# Altium PCB 7-SEGMENT.PcbDoc
Units mil, origin at the board's own origin, x right, y up, seen from the top; angles counter-clockwise.
Board outline 6000 x 4000 mil, 2 copper layers (Top Layer, Bottom Layer); 19 components, 31 nets, 85 pads, 10 vias.
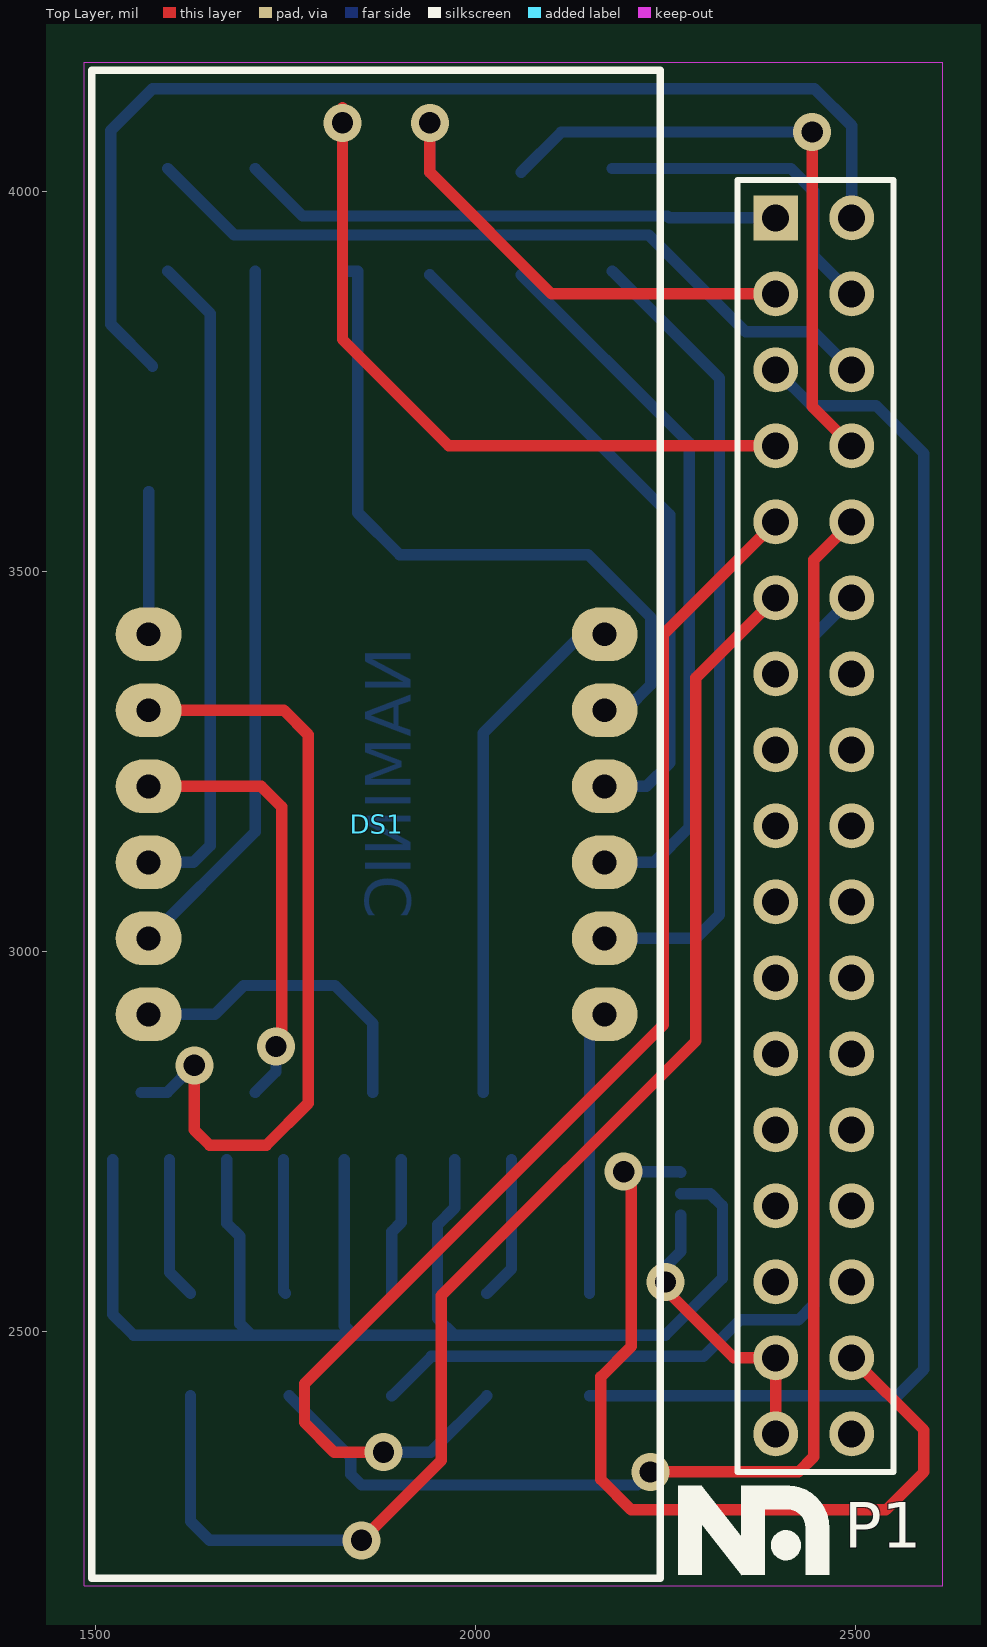
[diagram p0: Top Layer view]
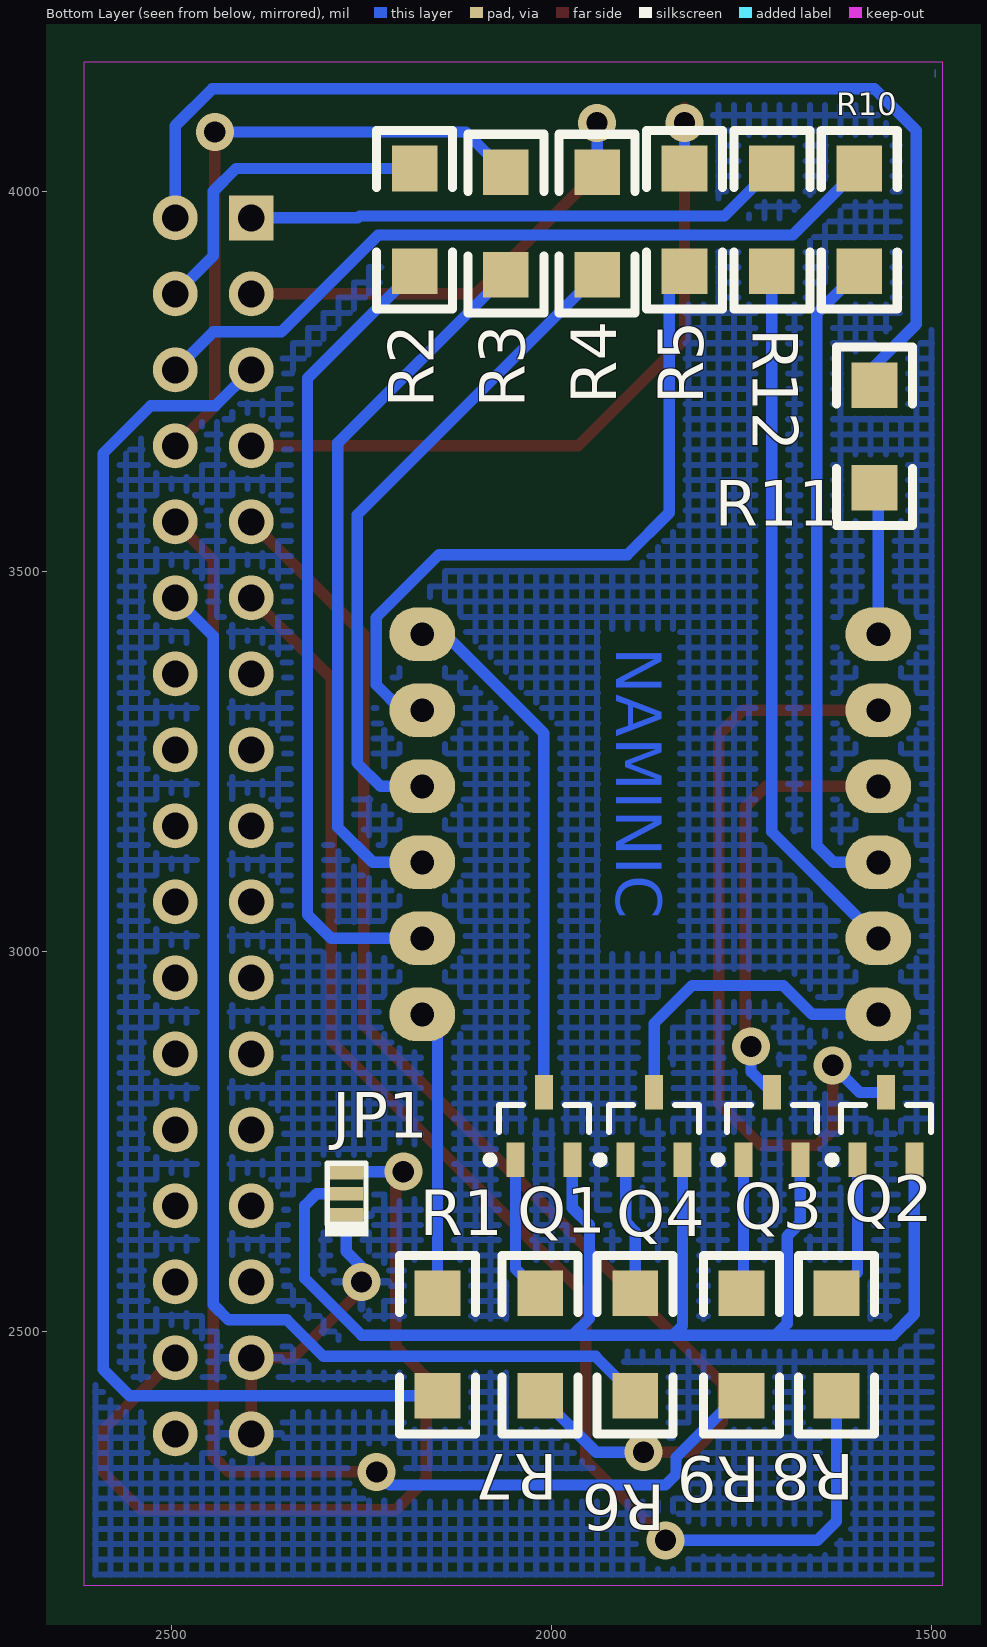
[diagram p1: Bottom Layer view, seen from below]
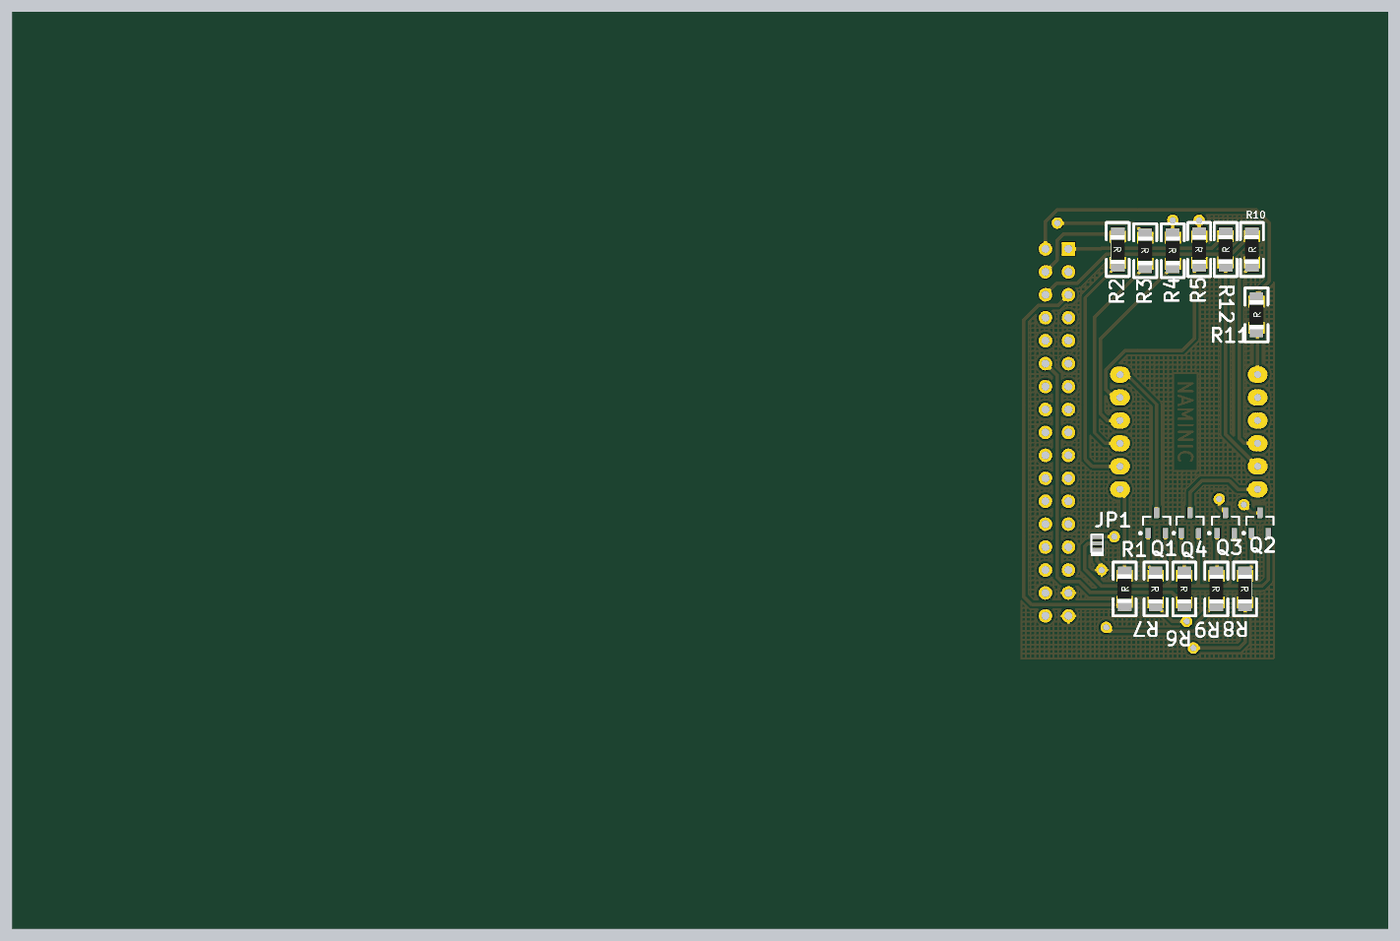
[diagram p2: 3D render of the assembled board from below, using the file's embedded part models]

## Layer stack, top to bottom
Top Layer: signal copper 1.4
Dielectric: dielectric 12.6, FR-4, Dk 4.8
Bottom Layer: signal copper 1.4

## Board outline
1000,1000 7000,1000 7000,5000 1000,5000

## Design rules (kind name [scope] priority, off if disabled: settings)
Clearance [All] p1: gap=10
PolygonConnect [All] p1: connectstyle=Relief reliefconductorwidth=10 reliefentries=4 polygonreliefangle="90 Angle"
RoutingVias [All] p1: holewidth=28 width=50 viastyle="Through Hole" minholewidth=28 minwidth=50 maxholewidth=28 maxwidth=50
SilkscreenOverComponentPads SilkToSolderMaskClearance [IsPad] p1: minsilkscreentomaskgap=10
SolderMaskExpansion [All] p1: expansion=4
Width [All] p1: maxlimit=20 minlimit=15 preferedwidth=15
27 further rules are at their usual default settings.

## Components (designator, comment, footprint, x,y, rotation, side; value= is the part's Value field where it differs from the comment)
DS1 "7Segment" 7SEGMENT 1495,2175 r90 top
JP1 "Jumper" JT3 2270,2680 r90 bottom
P1 "Header 17X2" HDR1X17 2395,3965 r270 top
Q1 "BC857C" SOT-23A_N 2010,2770 r90 bottom (schematic designator q1)
Q2 "BC857C" SOT-23A_N 1560,2770 r90 bottom (schematic designator q2)
Q3 "BC857C" SOT-23A_N 1710,2770 r90 bottom (schematic designator q3)
Q4 "BC857C" SOT-23A_N 1865,2770 r90 bottom (schematic designator q4)
R1 "180" 1206#1 2150,2415 r90 bottom
R2 "180" 1206#1 2180,4030 r270 bottom
R3 "180" 1206#1 2060,4025 r270 bottom
R4 "180" 1206#1 1940,4025 r270 bottom
R5 "180" 1206#1 1825,4030 r270 bottom
R6 "10K" 1206#1 1890,2550 r270 bottom
R7 "10K" 1206#1 2015,2550 r270 bottom
R8 "10K" 1206#1 1625,2550 r270 bottom
R9 "10K" 1206#2 1750,2550 r90 bottom
R10 "180" 1206#1 1595,3895 r90 bottom
R11 "180" 1206#1 1575,3610 r90 bottom
R12 "180" 1206#1 1710,3895 r90 bottom

## Footprints (in the part's own frame and the unit in brackets; to place one, negate y for a bottom-side part, rotate by r counter-clockwise, add the part's x,y. Pads: shape width x height; smd on the part's side, far side on the other; paste and mask are expansions set on the pad)
7SEGMENT [mm]
  oval 1.8x2.2 hole 0.8: 1(18.85,-1.905) 2(21.39,-1.905) 3(23.93,-1.905) 4(26.47,-1.905) 5(29.01,-1.905) 6(31.55,-1.905) 7(31.55,-17.145) 8(29.01,-17.145) 9(26.47,-17.145) 10(23.93,-17.145) 11(21.39,-17.145) 12(18.85,-17.145)
  silkscreen extent 0,-19 50.4,0
1206#1 [mil]
  rect 60x60 smd: 1(0,0) 2(135,0)
  silkscreen extent -50,-50 185,50, body extent -14,-35 151,36, height 25
1206#2 [mil]
  rect 60x60 smd: 1(0,0) 2(-135,0)
  silkscreen extent -185,-50 50,50, body extent -151,-36 14,35, height 25
HDR1X17 [mm] "Connector; Header; 17 Position"
  rect 1.5x1.5 hole 0.9: 1(0,0)
  round 1.5 hole 0.9: 2(0,2.54) 3(2.54,0) 4(2.54,2.54) 5(5.08,0) 6(5.08,2.54) 7(7.62,0) 8(7.62,2.54) 9(10.16,0) 10(10.16,2.54) 11(12.7,0) 12(12.7,2.54) 13(15.24,0) 14(15.24,2.54) 15(17.78,0) 16(17.78,2.54) 17(20.32,0) 18(20.32,2.54) 19(22.86,0) 20(22.86,2.54) 21(25.4,0) 22(25.4,2.54) 23(27.94,0) 24(27.94,2.54) 25(30.48,0) 26(30.48,2.54) 27(33.02,0) 28(33.02,2.54) 29(35.56,0) 30(35.56,2.54) 31(38.1,0) 32(38.1,2.54) 33(40.64,0) 34(40.64,2.54)
  silkscreen extent -1.27,-1.27 41.91,3.94
JT3 [mil]
  rect 18x45 smd mask+4: 1(-27,0) 2(1,0) 3(29,0)
  silkscreen extent -55,-30 41,28
SOT-23A_N [mm] "SOT23, 3-Leads, Body 2.9x1.3mm, Pitch 0.95mm, Lead Span 2.3mm, IPC Medium Density"
  rect 1.15x0.6 smd: 1(-1.125,0.95) 2(-1.125,-0.95) 3(1.125,0)
  silkscreen extent -1.25,-1.5 0.7,1.93, body extent -0.7,-1.5 0.7,1.5, height 1.09

## Part data
JP1: library part "Jumper Selector", "Jumper Selector"
P1: "Header, 17-Pin, Dual row"
Q1 Q2 Q3 Q4: "PNP General Purpose Amplifier"
R1 R2 R3 R4 R5 R6 R7 R8 R9 R10 R11 R12: library part Res1, "Resistor"

## Via types
v1: diameter 50, hole 28, Top Layer to Bottom Layer, 10 vias

## Nets (pads, with @x,y where several pads share a name; then routed paths per layer and width w, separated by ;. In a path a pad name is that pad's centre, name@x,y a point inside that pad or via, vN(x,y) a via of type N, cw(c..) or ccw(c..) an arc to the next point about the centre after c; other vN are vias at no path point)
3.3V: JP1.3 P1.32 | length 1138.6
  Top Layer w15: v1@2195,2700 v1(2195,2710) ; v1@2205,2690 2205,2480 2165,2440 2165,2305 2205,2265 2540,2265 2590,2315 2590,2370 P1.32
  Bottom Layer w15: v1(2195,2710) 2269,2710 JP1.3
A: P1.1 R12.2 | length 711.9
  Bottom Layer w15: R12.2 1772.5,3967.5 2252.5,3967.5 2255,3965 P1.1
B: P1.2 R11.2 | length 1471.9
  Bottom Layer w15: R11.2@1575,3770 1520,3825 1520,4080 1575,4135 2446.1,4135 2495,4086.1 P1.2
C: P1.3 R4.1 | length 651.3
  Top Layer w15: v1(1940,4090) 1940,4025 2100,3865 P1.3
  Bottom Layer w15: R4.1 v1(1940,4090)
D: P1.4 R2.1 | length 433.1
  Bottom Layer w15: R2.1 2415,4030 2445,4000 2445,3915 P1.4
DK1: P1.9 R7.2 | length 1728.6
  Top Layer w15: v1(1879,2341) 1814,2341 1775,2380 1775,2431 2247,2903 2247,3417 P1.9
  Bottom Layer w15: v1(1879,2341) 1941,2341 R7.2
DK2: P1.11 R8.2 | length 1866.1
  Top Layer w15: v1(1850,2225) 1955,2330 1955,2547 2290,2882 2290,3360 P1.11
  Bottom Layer w15: R8.2 1625,2250 1650,2225 v1(1850,2225)
DK3: P1.10 R9.2 | length 2017.6
  Top Layer w15: v1(2230,2315) 2425,2315 2445,2335 2445,3515 P1.10
  Bottom Layer w15: R9.2@1755,2415 1836.12,2333.88 1836.12,2311.69 1850,2297.82 2212.82,2297.82 v1(2230,2315)
DK4: P1.12 R6.2 | length 1555.4
  Bottom Layer w15: R6.2 1942,2467 2300,2467 2348,2515 2425,2515 2445,2535 2445,3415 P1.12
E: P1.5 R1.1 | length 1900.1
  Bottom Layer w15: R1.1 2555,2415 2590,2450 2590,3655 2527.03,3717.97 2442.03,3717.97 P1.5
F: P1.6 R10.2 | length 1009.8
  Bottom Layer w15: R10.2 1682.5,3942.5 2228,3942.5 2355.5,3815 2445,3815 P1.6
G: P1.7 R5.1 | length 993
  Top Layer w15: v1@1825,4110 v1(1825,4090) 1825,3805 1965,3665 P1.7
  Bottom Layer w15: R5.1 v1(1825,4090)
GND: JP1.1 P1.31 P1.33 | length 396.8
  Top Layer w15: v1(2250,2565) 2250,2555 2340,2465 P1.31 P1.33
  Bottom Layer w15: v1(2250,2565) 2240,2575 2270,2605 JP1.1
H: P1.8 R3.1 | length 839.5
  Top Layer w15: v1(2443,4078) 2443,3717 P1.8
  Bottom Layer w15: R3.1 2113,4078 v1(2443,4078)
K1: DS1.7 Q1.3 | length 686.6
  Bottom Layer w15: Q1.3 2010,3287 2140.13,3417.13 DS1.7
K2: DS1.5 Q2.3 | length 1059.2
  Top Layer w15: DS1.5 1747.87,3317.13 1780,3285 1780,2800 1725,2745 1650,2745 1630,2765 v1(1630,2850)
  Bottom Layer w15: Q2.3 1594.29,2814.29 v1(1630,2850)
K3: DS1.4 Q3.3 | length 558.6
  Top Layer w15: DS1.4@1587.87,3217.13 1717.87,3217.13 1745,3190 1745,2882.13 v1(1737.5,2874.63)
  Bottom Layer w15: Q3.3 1737.5,2841.79 v1(1737.5,2874.63)
K4: DS1.1 Q4.3 | length 447.4
  Bottom Layer w15: DS1.1@1587.87,2935 DS1.1 1657.13,2917.13 1695,2955 1815,2955 1865,2905 Q4.3
NetDS1_2: DS1.2 R12.1 | length 935.9
  Bottom Layer w15: DS1.2 1710,3157.13 R12.1
NetDS1_3: DS1.3 R10.1 | length 869.2
  Bottom Layer w15: DS1.3 1629,3117.13 1651,3139.13 1651,3839 R10.1
NetDS1_6: DS1.6 R11.1 | length 187.9
  Bottom Layer w15: DS1.6 R11.1@1570,3605
NetDS1_8: DS1.8 R5.2 | length 944
  Bottom Layer w15: R5.2 1845,3895 1845,3577 1900,3522 2148,3522 2230.81,3439.19 2230.81,3350.93 2197,3317.13 DS1.8
NetDS1_9: DS1.9 R4.2 | length 871.4
  Bottom Layer w15: R4.2 2255.81,3574.19 2255.81,3247.93 2225,3217.13 DS1.9
NetDS1_10: DS1.10 R3.2 | length 948.5
  Bottom Layer w15: R3.2 2281,3669 2281,3163 2235.13,3117.13 DS1.10
NetDS1_11: DS1.11 R2.2 | length 1069.1
  Bottom Layer w15: DS1.11 2290,3017.13 2321,3048.13 2321,3754 R2.2
NetDS1_12: DS1.12 R1.2 | length 375.4
  Bottom Layer w15: R1.2 2150,2897.13 DS1.12
NetJP1_2: JP1.2 Q1.2 Q2.2 Q3.2 Q4.2 | length 1933.9
  Bottom Layer w15: Q2.2 1522.6,2522.4 1550,2495 1705,2495 ; Q3.2 1672.6,2642.4 1690,2625 1690,2510 1705,2495 ; Q4.2 1827.6,2507.4 1840,2495 ; Q1.2 1972.6,2662.6 1950,2640 1950,2517 1972,2495 ; JP1.2 2309,2681 2325,2665 2325,2570 2250,2495 2195,2495 1972,2495 ; 1705,2495 1840,2495 ; 1840,2495 1972,2495
NetQ1_1: Q1.1 R7.1 | length 189.1
  Bottom Layer w15: R7.1 2047.4,2582.4 Q1.1
NetQ2_1: Q2.1 R8.1 | length 187.1
  Bottom Layer w15: Q2.1 1597.4,2577.6 R8.1
NetQ3_1: Q3.1 R9.1 | length 176.8
  Bottom Layer w15: Q3.1 1747.4,2552.6 R9.1
NetQ4_1: Q4.1 R6.1 | length 180.8
  Bottom Layer w15: R6.1 1890,2631 1902.4,2643.4 Q4.1
pads on no net: P1.13 P1.14 P1.15 P1.16 P1.17 P1.18 P1.19 P1.20 P1.21 P1.22 P1.23 P1.24 P1.25 P1.26 P1.27 P1.28 P1.29 P1.30 P1.34

## Polygon pours and split planes (outlines as drawn)
GND on Bottom Layer "top" (hatched 90Degree grid 20 track 8, remove dead copper, pour order 5): 1495,4164.98 1501.63,4170 2615,4170 2615,2175 1495,2175 1495,4170
no net on Bottom Layer "A1" (solid, pour order 2): 1495,4150 1495,4155 1495,4160

## Keep-outs
Keep-Out Layer:
  lines w1: 1485,2165 1485,4170 2615,4170 2615,2165 1485,2165

## Other copper
Bottom Layer:
  text "NAMINIC" at 1915,3400 h60 r90

## Silkscreen, mask and mechanical layers (free items; w line width, h text height)
Top Overlay:
  circle w19.68: c2408.41,2218.52 r10.04
  rectangle: 2266.68,2179.15 2298.18,2297.26
  rectangle: 2349.36,2179.15 2380.85,2297.26
  region: 2350.01,2178.43 2374.83,2197.82 2298.22,2295.88 2273.4,2276.49
  rectangle: 2434,2179.15 2465.5,2242.14
  region: 2410.38,2265.76 2410.38,2297.26 2349.36,2297.26 2349.36,2265.76
  lines w31.5: 2410.38,2281.51 cw(c2410.38,2242.14) 2449.75,2242.14